# Altium PCB KNoT_Thing_DevBoard.PcbDoc
Units mm, origin at the board's own origin, x right, y up, seen from the top; angles counter-clockwise.
Board outline 38.1 x 40.64 mm, 2 copper layers (Top Layer, Bottom Layer); 48 components, 49 nets, 211 pads, 40 vias.
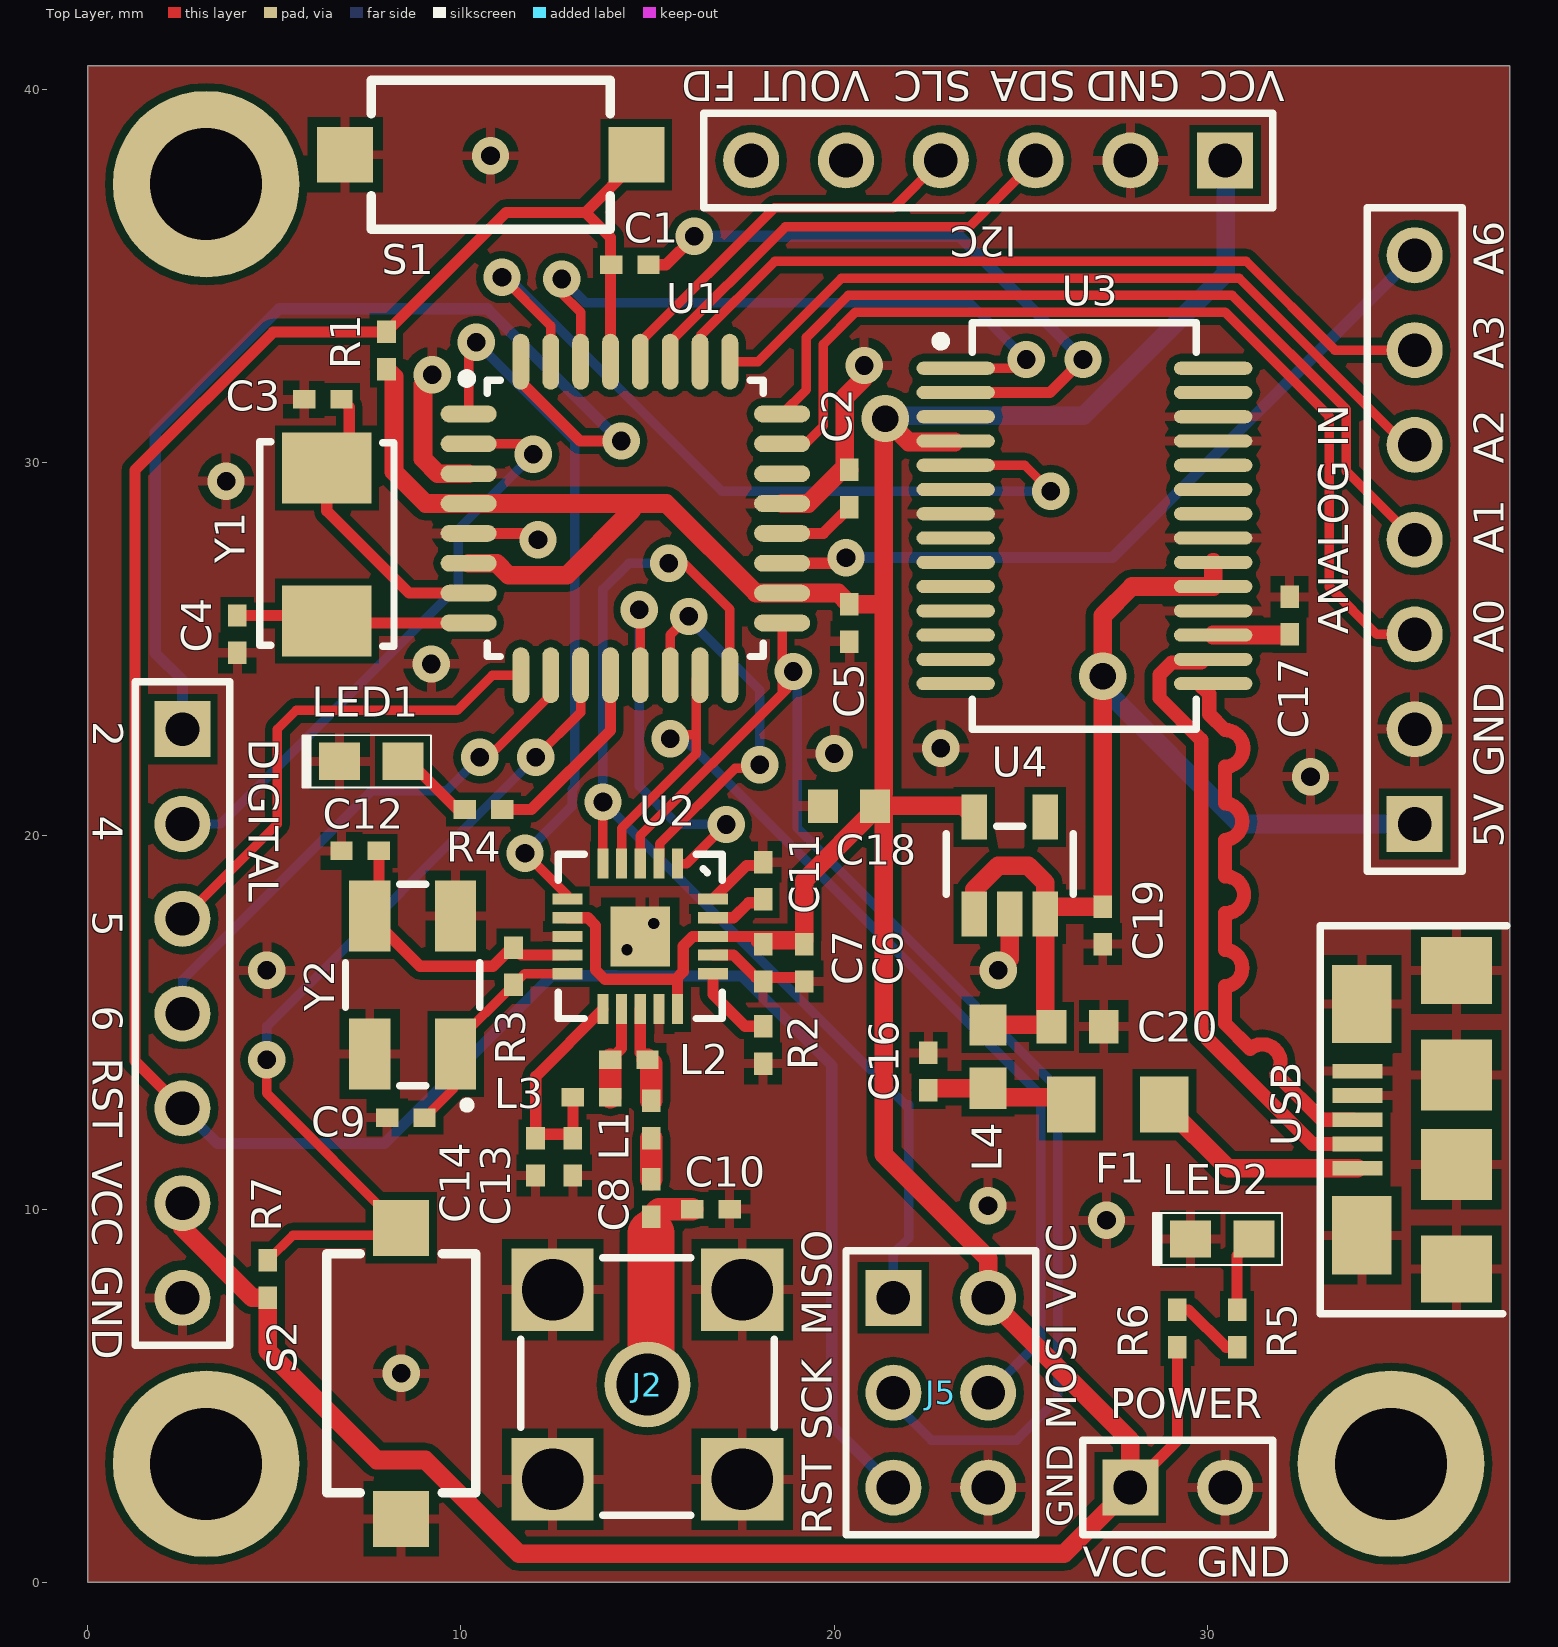
[diagram p0: Top Layer view]
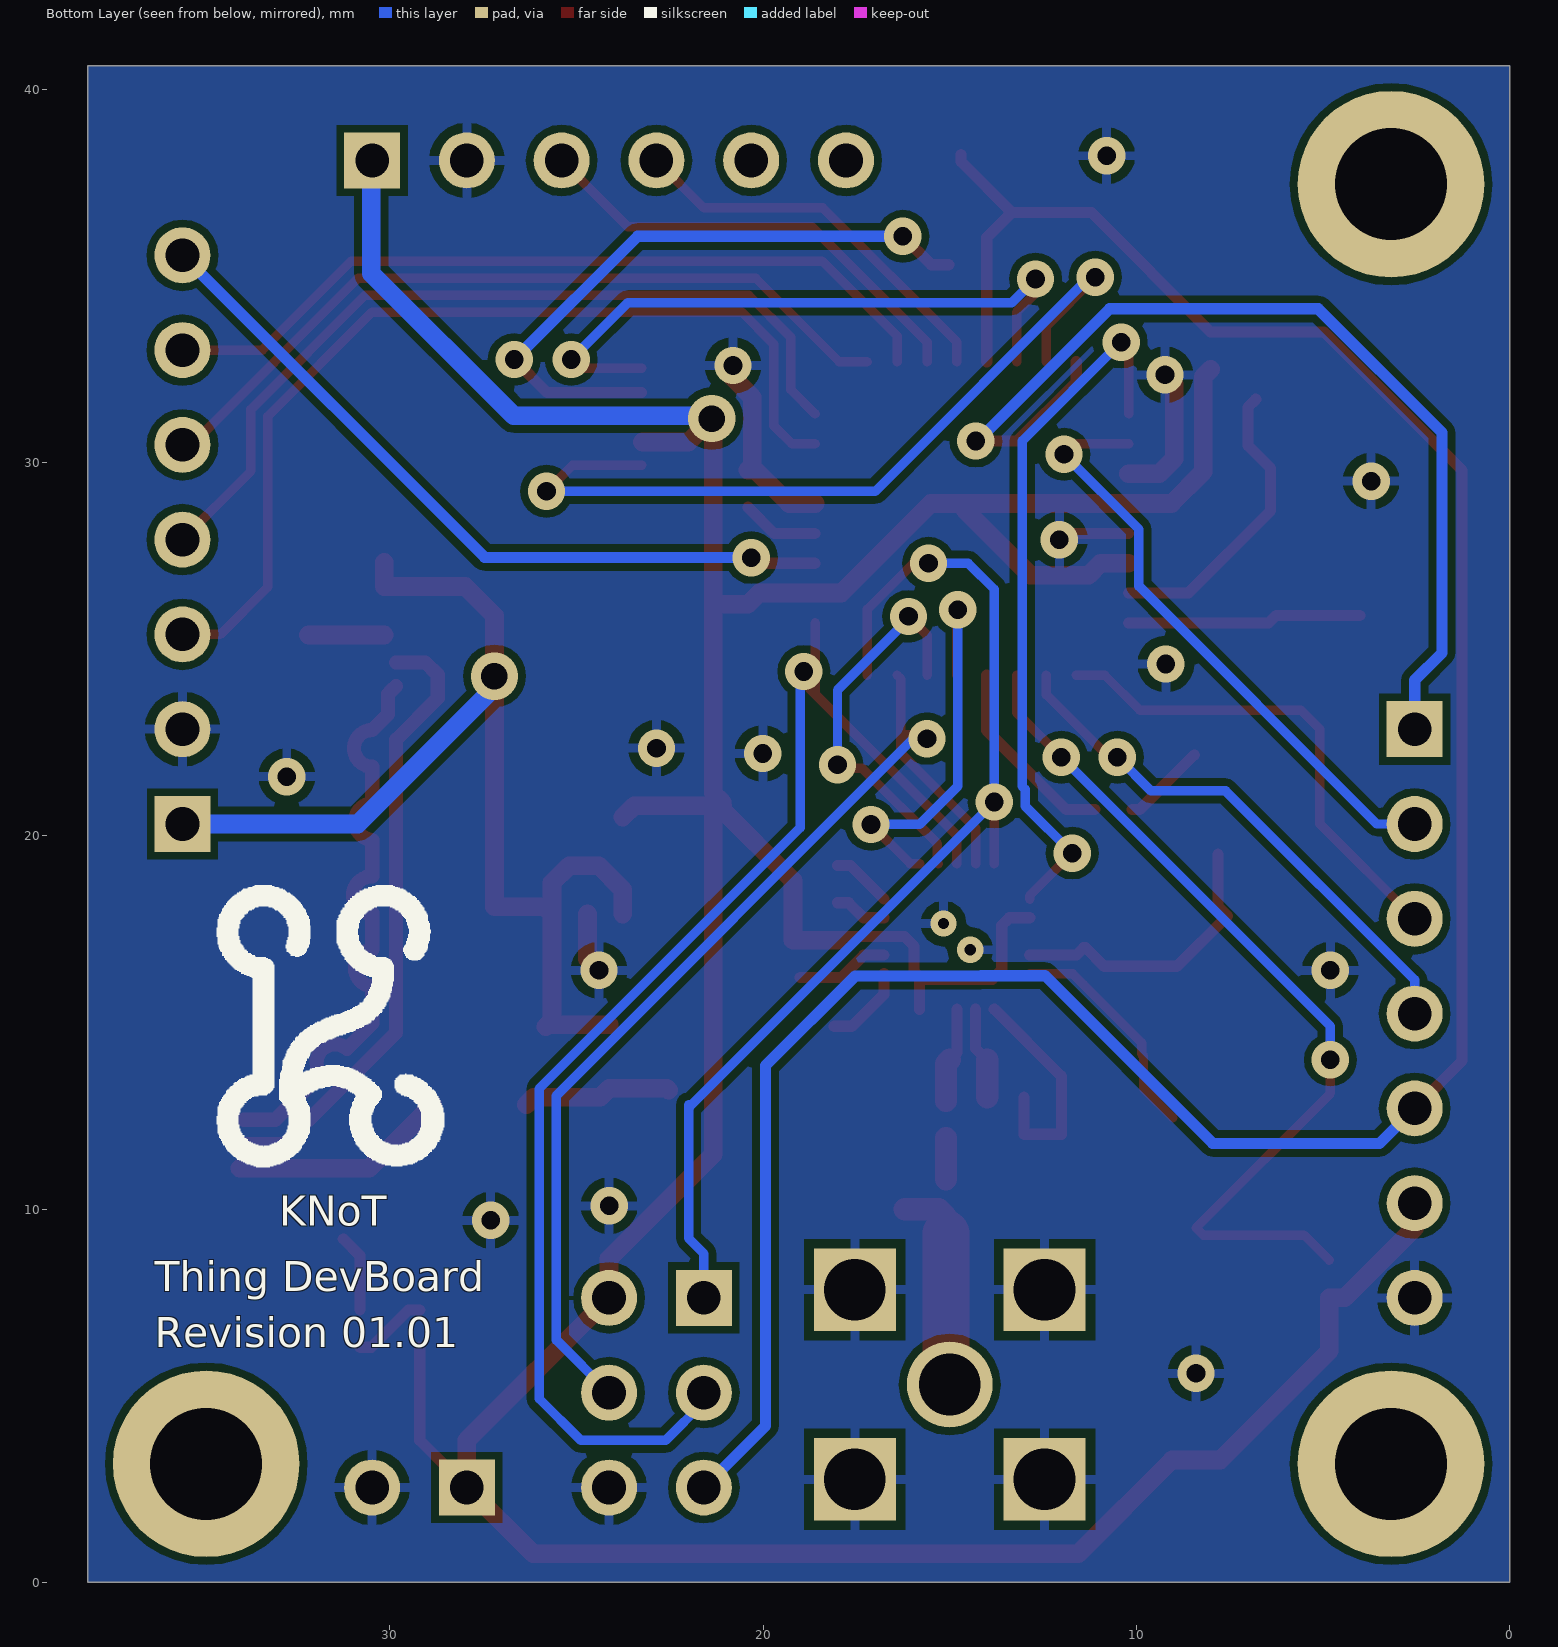
[diagram p1: Bottom Layer view, seen from below]

## Layer stack, top to bottom
Top Solder: solder mask 0.0102, Solder Resist, Dk 3.5
Top Layer: signal copper 0.0356
Dielectric 1: dielectric 0.32, FR-4, Dk 4.8
Bottom Layer: signal copper 0.0356
Bottom Solder: solder mask 0.0102, Solder Resist, Dk 3.5

## Board outline
0,0 0,40.64 38.1,40.64 38.1,0

## Design rules (kind name [scope] priority, off if disabled: settings)
AssemblyTestPointUsage [All] p1 off:
AssemblyTestpoint [All] p1 off: testpointundercomponent=TRUE minsize=1.016 maxsize=2.54 preferedsize=1.524 minholesize=0 maxholesize=1.016 preferedholesize=0.813 testpointgrid=0.025 usegrid=TRUE gridtolerance=0 allowsidetop=TRUE allowsidebottom=TRUE
Clearance [All] p1: gap=0.2
DiffPairsRouting DiffPair_USBDiffPairsRouting [InDifferentialPair ('USB')] p1: maxlimit=0.254 minlimit=0.254 mostfreqgap=0.254 toplayer_minwidth=0.381 toplayer_maxwidth=0.381 toplayer_prefwidth=0.381 bottomlayer_minwidth=0.381 bottomlayer_maxwidth=0.381 bottomlayer_prefwidth=0.381 maxuncoupledlength=12.7
DiffPairsRouting DiffPair_DiffPairsRouting [InDifferentialPair ('USB')] p2: maxlimit=0.254 minlimit=0.254 mostfreqgap=0.254 toplayer_minwidth=0.381 toplayer_maxwidth=0.381 toplayer_prefwidth=0.381 bottomlayer_minwidth=0.381 bottomlayer_maxwidth=0.381 bottomlayer_prefwidth=0.381 maxuncoupledlength=12.7
DiffPairsRouting DiffPairsRouting_1 [All] p3: maxlimit=0.254 minlimit=0.254 mostfreqgap=0.254 toplayer_minwidth=0.381 toplayer_maxwidth=0.381 toplayer_prefwidth=0.381 bottomlayer_minwidth=0.381 bottomlayer_maxwidth=0.381 bottomlayer_prefwidth=0.381 maxuncoupledlength=12.7
DiffPairsRouting [All] p4: maxlimit=0.254 minlimit=0.254 mostfreqgap=0.254 toplayer_minwidth=0.381 toplayer_maxwidth=0.381 toplayer_prefwidth=0.381 bottomlayer_minwidth=0.381 bottomlayer_maxwidth=0.381 bottomlayer_prefwidth=0.381 maxuncoupledlength=12.7
FabricationTestPointUsage [All] p1 off: valid=0 allowmultiple=FALSE
FabricationTestpoint [All] p1 off: side=3 testpointundercomponent=TRUE minsize=1.016 maxsize=2.54 preferedsize=1.524 minholesize=0 maxholesize=1.016 preferedholesize=0.813 testpointgrid=0.025 allowsidetop=TRUE allowsidebottom=TRUE usegrid=TRUE gridtolerance=0
HoleSize [All] p1: absolutevalues=TRUE maxlimit=10 minlimit=0.3 maxpercent=80.000 minpercent=20.000
MatchedLengths DiffPair_USBMatchedLengths [InDifferentialPair ('USB')] p1: tolerance=0.2 checknetsindiffpair=TRUE checkdiffpairvsdiffpair=TRUE checkothers=TRUE
MatchedLengths DiffPair_MatchedLengths [InDifferentialPair ('USB')] p2: tolerance=25.4 checknetsindiffpair=TRUE checkdiffpairvsdiffpair=TRUE checkothers=TRUE
MatchedLengths [All] p3 off: tolerance=25.4 checknetsindiffpair=TRUE checkdiffpairvsdiffpair=TRUE checkothers=TRUE
MinimumAnnularRing [All] p1: minimumring=0.2
MinimumSolderMaskSliver [All] p1: minsoldermaskwidth=0.064
NetAntennae [All] p1 off: netantennaetolerance=0
PolygonConnect [All] p1: connectstyle=Relief reliefconductorwidth=0.254 reliefentries=4 polygonreliefangle="90 Angle" airgapwidth=0.254
RoutingVias [All] p1: holewidth=0.5 width=1 viastyle="Through Hole" minholewidth=0.3 minwidth=0.5 maxholewidth=3 maxwidth=5
SilkToBoardRegionClearance [All] p1 off:
SilkToSilkClearance [All] p1: silktosilkclearance=0.064
SilkToSolderMaskClearance [All] p1: minsilkscreentomaskgap=0.064 clearancetoexposedcopper=TRUE
SolderMaskExpansion [All] p1: expansion=0.102
Width [All] p1: maxlimit=2 minlimit=0.2 preferedwidth=0.2 minimp=50.000000 maximp=50.000000 favimp=50.000000
18 further rules are at their usual default settings.

## Classes and differential pairs
component class Knot_Thing_USB_Power: C16 C17 C18 C19 C20 F1 J4 L4 LED2 R5 R6 U3 U4 USB
component class Knot_Thing_nRF: 1 C6 C7 C8 C9 C10 C11 C12 C13 C14 J2 J5 L1 L2 L3 R2 R3 U2 Y2
component class Knot_Thing_MCU: "ANALOG IN" C1 C2 C3 C4 C5 DIGITAL I2C LED1 POWER R1 R4 R7 S1 S2 U1 Y1

## Components (designator, comment, footprint, x,y, rotation, side; value= is the part's Value field where it differs from the comment)
"ANALOG IN" "Header 7" HDR1X7 35.56,20.32 r90 top
C1 "Cap_0402" CAPC1005L 14.529,35.306 r180 top
C2 "Cap_0402" CAPC1005L 20.408,29.308 r270 top
C3 "Cap_0402" CAPC1005L 6.3,31.7 r0 top
C4 "Cap_0402" CAPC1005L 4.008,25.408 r90 top
C5 "Cap_0402" CAPC1005L 20.408,25.708 r90 top
C6 "Cap_0402" CAPC1005L 19.2,16.6 r90 top
C7 "Cap_0402" CAPC1005L 18.1,16.6 r90 top
C8 "Cap_0402" CAPC1005L 15.1,10.3 r90 top
C9 "Cap_0402" CAPC1005L 8.525,12.45 r0 top
C10 "Cap_0402" CAPC1005L 16.7,10 r180 top
C11 "Cap_0402" CAPC1005L 18.1,18.8 r270 top
C12 "Cap_0402" CAPC1005L 7.3,19.6 r180 top
C13 "Cap_0402" CAPC1005L 13,11.4 r90 top
C14 "Cap_0402" CAPC1005L 12,11.4 r90 top
C16 "Cap_0402" CAPC1005L 22.527,13.689 r270 top
C17 "Cap_0402" CAPC1005L 32.208,25.908 r90 top
C18 "Cap0603" CAPC1608L 20.4,20.8 r180 top
C19 "Cap_0402" CAPC1005L 27.2,17.6 r270 top
C20 "Cap0603" CAPC1608L 26.527,14.889 r0 top
DIGITAL "Header 7" HDR1X7 2.54,22.86 r270 top
F1 "0402L050SLKR" 0805L 27.6,12.8 r180 top
I2C "Header 6" HDR1X6 30.48,38.1 r180 top
J2 "32K249-400L5" ROS-32K249-400L5_V 15,5.3 r180 top
J5 "Header 3X2" HDR2X3 21.59,7.62 r270 top
L1 "Inductor0402" CAPC1005L 15.1,12.4 r90 top
L2 "Inductor0402" CAPC1005L 14.5,14 r180 top
L3 "Inductor0402" CAPC1005L 13.5,13 r180 top
L4 "Ferrite" 0603-cap 24.127,14.089 r90 top
LED1 "LED 0603" 0603_LED 7.6,22 r180 top
LED2 "LED 0603" 0603_LED 30.4,9.2 r180 top
POWER "Header 2H" HDR1X2 27.94,2.54 r0 top
R1 "RES_0402" CAPC1005L 8.008,33.008 r270 top
R2 "RES_0402" CAPC1005L 18.1,14.4 r90 top
R3 "RES_0402" CAPC1005L 11.408,16.508 r90 top
R4 "RES_0402" CAPC1005L 10.608,20.708 r0 top
R5 "RES_0402" CAPC1005L 30.8,6.8 r270 top
R6 "RES_0402" CAPC1005L 29.2,6.8 r270 top
R7 "RES_0402" CAPC1005L 4.826,8.128 r270 top
S1 "SW-SPST" "SWITCH TS-1181" 10.8,38.254 r0 top
S2 "SW-SPST" "SWITCH TS-1181" 8.4,5.6 r90 top
U1 "ATmega328-AU" 32A_L 14.408,28.508 r0 top
U2 "nRF24L01+ QFN20" QFN20 14.808,17.308 r270 top
U3 "FT232RL-Reel" SSOP-28_N 26.708,28.308 r0 top (schematic designator U4)
U4 "MIC5205-3.3YM5" SOT23-5 24.708,19.208 r0 top (schematic designator U5)
USB "ZX62-B-5PA-33" "Micro USB b" 36.474,12.395 r90 top
Y1 "8 MHz" CX5032GB 6.408,27.808 r90 top
Y2 "16 MHz" SPK-16M-5032 8.708,16.008 r90 top

## Footprints (in the part's own frame and the unit in brackets; to place one, negate y for a bottom-side part, rotate by r counter-clockwise, add the part's x,y. Pads: shape width x height; smd on the part's side, far side on the other; paste and mask are expansions set on the pad)
32A_L [mm] "Thin QFP, 32-Leads, Body 7x7mm, Pitch 0.8mm, IPC High Density"
  oval 1.5x0.45 smd: 1(-4.2,2.8) 2(-4.2,2) 3(-4.2,1.2) 4(-4.2,0.4) 5(-4.2,-0.4) 6(-4.2,-1.2) 7(-4.2,-2) 8(-4.2,-2.8) 17(4.2,-2.8) 18(4.2,-2) 19(4.2,-1.2) 20(4.2,-0.4) 21(4.2,0.4) 22(4.2,1.2) 23(4.2,2) 24(4.2,2.8)
  oval 0.45x1.5 smd: 9(-2.8,-4.2) 10(-2,-4.2) 11(-1.2,-4.2) 12(-0.4,-4.2) 13(0.4,-4.2) 14(1.2,-4.2) 15(2,-4.2) 16(2.8,-4.2) 25(2.8,4.2) 26(2,4.2) 27(1.2,4.2) 28(0.4,4.2) 29(-0.4,4.2) 30(-1.2,4.2) 31(-2,4.2) 32(-2.8,4.2)
  silkscreen extent -4.37,-3.7 3.7,3.87, body extent -4.51,-4.51 4.51,4.51, height 1.1
0603-cap [mm] "0603 Hermes"
  rect 1.1x1 smd: 1(-0.85,0) 2(0.85,0)
  body extent -0.8,-0.4 0.8,0.4, height 0.3
0603_LED [mm] "LED tamanho 0603"
  rect 1.1x1 smd: 1(-0.85,0) 2(0.85,0)
  silkscreen extent -1.6,-0.7 1.85,0.7, body extent -0.83,-0.38 0.83,0.35, height 0.68
0805L [mm] "0805 Hermes"
  rect 1.3x1.5 smd: 1(-1.25,0) 2(1.25,0)
  body extent -1.1,-0.75 1.1,0.75, height 1.24
CAPC1005L [mm]
  rect 0.6x0.5 smd: 1(-0.5,0) 2(0.5,0)
  body extent -0.55,-0.3 0.55,0.3, height 0.6
CAPC1608L [mm]
  rect 0.8x0.9 smd: 1(-0.7,0) 2(0.7,0)
  body extent -0.87,-0.48 0.87,0.48, height 0.85
CX5032GB [mm] "Quartz Crystal 8MHz"
  rect 1.9x2.4 smd: 1(-2.05,0) 1(-2.05,0) 2(2.05,0)
  silkscreen extent -2.72,-1.8 2.75,1.8, body extent -2.5,-1.6 2.5,1.6, height 1.3
HDR1X2 [mm] "Connector; Header; 2 Position"
  rect 1.5x1.5 hole 0.9: 1(0,0)
  round 1.5 hole 0.9: 2(2.54,0)
  silkscreen extent -1.27,-1.27 3.81,1.27
HDR1X6 [mm] "Connector; Header; 6 Position"
  rect 1.5x1.5 hole 0.9: 1(0,0)
  round 1.5 hole 0.9: 2(2.54,0) 3(5.08,0) 4(7.62,0) 5(10.16,0) 6(12.7,0)
  silkscreen extent -1.27,-1.27 13.97,1.27
HDR1X7 [mm] "Connector; Header; 7 Position"
  rect 1.5x1.5 hole 0.9: 1(0,0)
  round 1.5 hole 0.9: 2(2.54,0) 3(5.08,0) 4(7.62,0) 5(10.16,0) 6(12.7,0) 7(15.24,0)
  silkscreen extent -1.27,-1.27 16.51,1.27
HDR2X3 [mm] "Connector; Header; 3x2 Position"
  rect 1.5x1.5 hole 0.9: 1(0,0)
  round 1.5 hole 0.9: 2(0,2.54) 3(2.54,0) 4(2.54,2.54) 5(5.08,0) 6(5.08,2.54)
  silkscreen extent -1.27,-1.27 6.35,3.81
"Micro USB b" [mm]
  rect 0.4x1.35 smd: 1(-1.3,2.449) 2(-0.65,2.449) 3(0,2.449) 4(0.65,2.449) 5(1.3,2.449)
  rect 2.1x1.6 smd: 6(3.1,2.33) 11(-3.1,2.33)
  rect 1.8x1.9 smd: 7(4,-0.201) 10(-4,-0.201)
  rect 1.9x1.9 smd: 8(1.2,-0.2) 9(-1.2,-0.201)
  silkscreen extent -5.2,-1.55 5.2,3.45, body extent -4.04,-2.7 4.04,2.9, height 2.78
QFN20 [mm]
  rect 0.8x0.3 smd: 1(-1.95,1) 2(-1.95,0.5) 3(-1.95,0) 4(-1.95,-0.5) 5(-1.95,-1) 11(1.95,-1) 12(1.95,-0.5) 13(1.95,0) 14(1.95,0.5) 15(1.95,1)
  rect 0.3x0.8 smd: 6(-1,-1.95) 6(-1,-1.95) 7(-0.5,-1.95) 8(0,-1.95) 9(0.5,-1.95) 10(1,-1.95) 16(1,1.95) 17(0.5,1.95) 18(0,1.95) 19(-0.5,1.95) 20(-1,1.95)
  rect 1.6x1.6 smd: 21(0,0)
  silkscreen extent -2.2,-2.2 2.2,2.2, body extent -2.01,-2.01 2.01,2.01, height 0.78
ROS-32K249-400L5_V [mm] "SMA Right Angle Jack, 14.8x6.35x9.7mm, Rosenberger Recommended"
  round 2.3 hole 1.65: 1(0,0)
  rect 2.2x2.2 hole 1.65: MH(-2.54,2.54) MH(-2.54,-2.54) MH(2.54,2.54) MH(2.54,-2.54)
  silkscreen extent -3.4,-3.4 3.4,3.5, body extent -4.68,-3.18 4.65,38.97, height 88.23
SOT23-5 [mm]
  rect 0.69x1.2 smd: 1(-0.95,-1.3) 2(0,-1.3) 3(0.95,-1.3) 4(0.95,1.3) 5(-0.95,1.3)
  silkscreen extent -1.7,-0.77 1.7,1.05, body extent -1.5,-1.25 1.5,1.25, height 1.05
SPK-16M-5032 [mm] "Crystal Oscilator"
  rect 1.9x1.1 smd: 1(-1.85,-1.15) 2(1.85,-1.15) 3(1.85,1.15) 4(-1.85,1.15)
  silkscreen extent -3.3,-1.8 2.7,1.8, body extent -2.5,-1.6 2.5,1.6, height 0.9
SSOP-28_N [mm] "SOP, 28-Leads, Body 10.2x5.3mm, Pitch 0.65mm, IPC Medium Density"
  oval 2.1x0.35 smd: 1(-3.45,4.225) 2(-3.45,3.575) 3(-3.45,2.925) 4(-3.45,2.275) 5(-3.45,1.625) 6(-3.45,0.975) 7(-3.45,0.325) 8(-3.45,-0.325) 9(-3.45,-0.975) 10(-3.45,-1.625) 11(-3.45,-2.275) 12(-3.45,-2.925) 13(-3.45,-3.575) 14(-3.45,-4.225) 15(3.45,-4.225) 16(3.45,-3.575) 17(3.45,-2.925) 18(3.45,-2.275) 19(3.45,-1.625) 20(3.45,-0.975) 21(3.45,-0.325) 22(3.45,0.325) 23(3.45,0.975) 24(3.45,1.625) 25(3.45,2.275) 26(3.45,2.925) 27(3.45,3.575) 28(3.45,4.225)
  silkscreen extent -3.97,-5.45 3,5.45, body extent -3.9,-5.1 3.9,5.1, height 1.9
"SWITCH TS-1181" [mm]
  rect 1.5x1.5 smd: 1(-3.9,0) 2(3.9,0)
  silkscreen extent -3.2,-2 3.2,2, body extent -4,-1.8 4,1.8, height 2.4

## Part data
"ANALOG IN" DIGITAL: "Header, 7-Pin"
C1 C2 C3 C4 C5 C6 C7 C8 C9 C10 C11 C12 C13 C14 C16 C17 C19: library part Capacitor_0402, "Chip Capacitor 0402 (1005 metric)"
C18 C20: "4.7µF 10V Ceramic Capacitor X5R 0603"
F1: library part "Fuse 2", "PTC Resettable Fuse 6V 500mA Ih Surface Mount 0402 (1005 Metric), Concave"
I2C: "Header, 6-Pin"
J2: "SMA Right Angle Jack, Up to 18 GHz, -65 to 165 degC"
J5: "Header, 3-Pin, Dual row"
L1 L2 L3: "Inductor 27nH"
L4: "BLM18AG121SN1 FERRITE 120 OHM 500MA 0603"
LED1 LED2: "LED SMD 0603"
POWER: "Header, 2-Pin, Right Angle"
R1 R2 R3 R4 R5 R6 R7: "Precision Thick Film Chip Resistor, 10 Ohm to 1M Ohm Range, 1% and 0.5% Tolerance, 0805 Size, 1/8 W"
S1 S2: "Single-Pole, Single-Throw Switch"
U1: "8-bit AVR Microcontroller, 32KB Flash, 1KB EEPROM, 2KB SRAM, 32-pin TQFP, Industrial Grade (-40°C to 85°C)"
U2: library part nRF24L01+, "IC RF TxRx Only General ISM > 1GHZ 2.4GHz"
U3: "USB UART Asynchronous Serial Data Transfer Chip, 28-pin SSOP, Tape and Reel"
U4: "Voltage Regulator"
USB: "USB Connector"
Y1: library part XTAL, "Crystal FOXSLF/080-20"
Y2: library part XTAL_SMD, "Crystal FOXSLF/080-20"

## Free pads (board coordinates)
  round 5 hole 3: ""(3.175,3.175) ""(3.175,37.465) ""(34.925,3.175)

## Via types
v1: diameter 1, hole 0.5, Top Layer to Bottom Layer, 36 vias
v2: diameter 1.27, hole 0.711, Top Layer to Bottom Layer, 2 vias
v3: diameter 0.7, hole 0.3, Top Layer to Bottom Layer, 2 vias

## Nets (pads, with @x,y where several pads share a name; then routed paths per layer and width w, separated by ;. In a path a pad name is that pad's centre, name@x,y a point inside that pad or via, vN(x,y) a via of type N, cw(c..) or ccw(c..) an arc to the next point about the centre after c; other vN are vias at no path point)
FTDI_DTR: C1.1 U3.2 | length 17.1
  Top Layer w0.3: C1.1 15.494,35.306 v1(16.256,36.068) ; U3.2 25.787,31.883 v1(26.67,32.766)
  Bottom Layer w0.3: v1(16.256,36.068) 23.368,36.068 v1(26.67,32.766)
GND: "ANALOG IN.2" C2.1 C3.1 C4.1 C5.1 C6.1 C7.1 C9.1 C10.1 C11.1 C12.2 C13.1 C14.1 C16.1 C17.2 C18.2 C19.2 C20.2 DIGITAL.7 I2C.2 J2.MH J5.6 LED1.2 LED2.2 POWER.2 R2.1 S1.1 S2.1 U1.3 U1.5 U1.21 U2.8 U2.14 U2.17 U2.20 U2.21 U3.7 U3.18 U3.21 U3.25 U3.26 U4.2 USB.4 USB.5 USB.6 USB.7 USB.8 USB.9 USB.10 USB.11 Y2.2 Y2.4 | length 16.7
  Top Layer w0.3: v1@8.983,32.108 v1(9.233,32.358) ; U1.5 11.897,28.108 v1(12.065,27.94) ; U2.17 17.303,16.808 17.903,16.208 C6.1@19.008,16.208 ; U2.20 17.658,19.208 C11.1@18.008,19.208 ; v1(24.4,16.4) v1@24.708,16.708
  Top Layer w0.5: v1@8.983,32.108 8.983,30.108 9.383,29.708 U1.3 ; U1.21 19.308,28.908 20.208,29.808 C2.1 20.288,29.928 20.288,31.754 20.808,32.274 v1(20.808,32.608) ; v1@24.708,16.708 U4.2
  other v1: 8.4,5.6 27.3,9.7 24.127,10.089 4.8,16.4 32.766,21.59 20.008,22.208 22.86,22.352 9.208,24.608 3.708,29.508 10.795,38.227
  other v3: 14.45,16.95 15.17,17.65
MCU_ADC0: "ANALOG IN.3" U1.23 | length 25.9
  Top Layer w0.254: U1.23 19.231,30.508 19.711,30.988 19.711,33.173 20.574,34.036 30.48,34.036 33.274,31.242 33.274,26.67 34.544,25.4 35.56,25.4
MCU_ADC1: "ANALOG IN.4" U1.24 | length 22.8
  Top Layer w0.254: U1.24 19.257,31.957 19.257,33.361 20.386,34.49 30.668,34.49 33.728,31.43 33.728,29.772 35.56,27.94
MCU_ADC2: "ANALOG IN.5" U1.25 | length 21.1
  Top Layer w0.254: U1.25 17.962,32.708 20.198,34.944 30.856,34.944 35.32,30.48 35.56,30.48
MCU_ADC3: "ANALOG IN.6" U1.26 | length 21.7
  Top Layer w0.254: U1.26 16.408,33.392 18.414,35.398 31.044,35.398 33.422,33.02 35.56,33.02
MCU_ADC6: "ANALOG IN.7" U1.19 | length 20.4
  Top Layer w0.3: U1.19 20.17,27.308 v1(20.32,27.458)
  Bottom Layer w0.3: v1(20.32,27.458) 27.458,27.458 35.56,35.56
MCU_ADC7: U1.22
MCU_AIN0: DIGITAL.4 U1.10 | length 14.5
  Top Layer w0.254: v1(10.508,22.108) 10.734,22.108 12.408,23.782 U1.10
  Bottom Layer w0.254: DIGITAL.4 2.54,16.14 7.608,21.208 9.608,21.208 v1(10.508,22.108)
MCU_AIN1: R7.1 S2.2 U1.11 | length 23.7
  Top Layer w0.254: v1(4.8,14) 4.8,13.1 S2.2 8.2,9.3 5.498,9.3 R7.1 ; v1(12.008,22.108) 13.208,23.308 U1.11
  Bottom Layer w0.254: v1(4.8,14) 4.8,14.9 v1(12.008,22.108)
MCU_AREF: C2.2 U1.20 | length 2.1
  Top Layer w0.3: U1.20 19.708,28.108 C2.2
MCU_I2C_SDA: I2C.3 U1.27 | length 12.3
  Top Layer w0.254: U1.27 15.608,33.234 18.696,36.322 23.622,36.322 I2C.3
MCU_I2C_SLC: I2C.4 U1.28 | length 10.6
  Top Layer w0.254: U1.28 14.808,33.234 18.404,36.83 21.59,36.83 I2C.4
MCU_INT0: DIGITAL.1 U1.32 | length 27.5
  Top Layer w0.3: U1.32 11.608,32.17 13.196,30.582 v1(14.3,30.582)
  Bottom Layer w0.3: DIGITAL.1 2.54,24.176 1.808,24.908 1.808,30.808 5.125,34.125 10.718,34.125 14.262,30.582 v1(14.3,30.582)
MCU_LED: R4.2 U1.12 | length 5.3
  Top Layer w0.3: R4.2 11.886,20.708 14.008,22.83 U1.12
MCU_NRF_CE: U1.13 U2.1 | length 11
  Top Layer w0.254: v1(14.783,26.06) 14.808,26.035 U1.13 ; U2.1 16.058,19.258 v1(17.108,20.308)
  Bottom Layer w0.254: v1(14.783,26.06) 14.781,26.058 14.781,21.335 15.808,20.308 v1(17.108,20.308)
MCU_NRF_IRQ: U1.1 U2.6 | length 19.1
  Top Layer w0.254: U1.1 10.208,32.908 10.408,33.108 v1(10.408,33.233) ; v1(11.719,19.539) 12.858,18.4 U2.6@12.858,18.308
  Bottom Layer w0.254: v1(10.408,33.233) 13.056,30.585 13.056,21.325 12.981,21.25 12.981,20.801 v1(11.719,19.539)
MCU_RESET: C1.2 DIGITAL.5 J5.5 R1.1 S1.2 U1.29 | length 71.9
  Top Layer w0.3: DIGITAL.5@2.9,12.7 DIGITAL.5 1.27,13.97 1.27,29.805 4.973,33.508 R1.1 11.207,36.707 13.339,36.707 ; U1.29 14.008,36.038 13.339,36.707 ; S1.2 14.7,38.068 13.339,36.707
  Bottom Layer w0.3: DIGITAL.5 3.48,11.76 7.95,11.76 12.446,16.256 14.154,16.256 14.16,16.25 17.532,16.25 19.939,13.843 19.939,4.191 J5.5
MCU_RXD: U1.30 U3.1 | length 17.8
  Top Layer w0.254: v1(12.7,34.925) 12.7,34.544 13.208,34.036 U1.30 ; U3.1 24.913,32.533 v1(25.146,32.766)
  Bottom Layer w0.254: v1(12.7,34.925) 13.335,34.29 23.622,34.29 v1(25.146,32.766)
MCU_SPI_CSN: U1.14 U2.2 | length 10.6
  Top Layer w0.254: U2.2 15.331,19.281 15.331,19.793 17.346,21.808 17.908,21.808 v1(18.008,21.908) ; U1.14 15.608,25.387 v1(16.104,25.883)
  Bottom Layer w0.254: v1(16.104,25.883) 16.104,25.812 18.008,23.908 v1(18.008,21.908)
MCU_SPI_MISO: J5.1 U1.16 U2.5 | length 30.2
  Top Layer w0.254: U2.5 v1(13.808,20.908) ; v1(15.57,27.305) 15.977,27.305 17.208,26.074 U1.16
  Bottom Layer w0.254: v1(15.57,27.305) 14.503,27.305 13.808,26.609 v1(13.808,20.908) 21.958,12.758 ; J5.1 21.59,8.81 22,9.22 22,12.8
MCU_SPI_MOSI: J5.4 U1.15 U2.4 | length 29.1
  Top Layer w0.254: U2.4 14.308,20.208 16.308,22.208 16.308,22.708 ; v1(15.608,22.608) 15.708,22.708 16.308,22.708 ; U1.15 16.308,24.208 16.308,22.708
  Bottom Layer w0.254: v1(15.608,22.608) 15.978,22.608 25.542,13.044 25.542,6.492 J5.4
MCU_SPI_SCK: J5.3 U1.17 U2.3 | length 36.8
  Top Layer w0.254: U2.3@14.831,19.281 U2.3 14.808,20.008 18.608,23.808 ; U1.17 18.608,23.808 ; v1(18.908,24.408) 18.908,24.108 18.608,23.808
  Bottom Layer w0.254: v1(18.908,24.408) 19.008,24.308 19.008,20.22 26,13.228 26,4.918 24.892,3.81 22.606,3.81 21.59,4.826 J5.3
MCU_T0: DIGITAL.2 U1.2 | length 16.2
  Top Layer w0.254: U1.2 11.656,30.508 v1(11.938,30.226)
  Bottom Layer w0.254: DIGITAL.2 3.556,20.32 9.931,26.695 9.931,28.219 v1(11.938,30.226)
MCU_T1: DIGITAL.3 U1.9 | length 13.3
  Top Layer w0.254: DIGITAL.3 5.08,20.32 5.08,22.86 5.588,23.368 9.906,23.368 10.846,24.308 U1.9
MCU_TXD: U1.31 U3.5 | length 22.9
  Top Layer w0.254: v1@11.1,35.128 v1(11.1,34.975) 12.408,33.666 U1.31 ; U3.5 25.109,29.933 v1(25.806,29.235)
  Bottom Layer w0.254: v1(11.1,34.975) 11.253,34.975 16.993,29.235 v1(25.806,29.235)
MCU_XTAL1: C3.2 U1.7 Y1.2 | length 8
  Top Layer w0.3: C3.2 7.008,31.492 7.008,30.458 Y1.2 6.408,28.708 8.608,26.508 U1.7
MCU_XTAL2: C4.2 U1.8 Y1.1 | length 6.3
  Top Layer w0.3: C4.2 6.258,25.908 6.408,25.758 6.458,25.708 U1.8
NetC8_1: C8.1 C10.2 J2.1 | length 5.3
  Top Layer w0.6: C8.1@15.298,9.998 C10.2@16.198,9.998
  Top Layer w0.602: J2.1 J2.1@15.1,5.4 ; C8.1 C8.1@15.298,9.998 ; C10.2@16.198,9.998 C10.2
  Top Layer w1.26: J2.1@15.1,5.4 15.1,9.347
NetC8_2: C8.2 L1.1 | length 1.1
  Top Layer w0.6: C8.2 L1.1
NetLED1_1: LED1.1 R4.1 | length 2.3
  Top Layer w0.3: LED1.1@8.45,22.166 9.908,20.708 R4.1
NetLED2_1: LED2.1 R5.1 | length 2.1
  Top Layer w0.3: R5.1 30.8,8.75 LED2.1
NetR5_2: R5.2 R6.1 | length 2
  Top Layer w0.3: R6.1 29.5,7.3 30.5,6.3 R5.2
NRF_DVDD: C11.2 U2.19 | length 1.4
  Top Layer w0.3: U2.19 17.308,17.808 17.708,18.208 C11.2@18.008,18.208
NRF_IREF: R2.2 U2.16 | length 2.2
  Top Layer w0.3: U2.16 16.758,15.758 17.616,14.9 R2.2
NRF_SMA_CONNECTOR1: L1.2 L2.1 U2.13 | length 2.6
  Top Layer w0.3: U2.13 14.808,14.192 L2.1
  Top Layer w0.6: L1.2 L2.1@15.1,13.9
  Top Layer w0.601: L2.1 L2.1@15.1,13.9
NRF_SMA_CONNECTOR2: L2.2 L3.1 U2.12 | length 2.5
  Top Layer w0.3: L2.2 14.308,14.308 U2.12
  Top Layer w0.6: L3.1 L2.2
NRF_VDD_PA: C13.2 C14.2 L3.2 U2.11 | length 6.1
  Top Layer w0.3: L3.2@13.008,13.008 13.008,12.008 12.008,12.008 12.008,13.558 U2.11
NRF_XTAL1: C9.2 R3.1 U2.10 Y2.1 | length 6.1
  Top Layer w0.254: C9.2 9.808,13.233 9.808,14.108 Y2.1 9.858,14.458 R3.1 11.708,16.308 U2.10
NRF_XTAL2: C12.1 R3.2 U2.9 Y2.3 | length 7.9
  Top Layer w0.3: C12.1@7.808,19.508 7.808,18.108 Y2.3 8.908,16.508 10.863,16.508 11.363,17.008 R3.2 11.608,16.808 U2.9
NT3_FD: I2C.6
NT3_VOUT: I2C.5
USB_DM_FTDI: U3.16 USB.2 | length 16.6
  Top Layer w0.381: U3.16@29.84,24.649 29.049,24.649 28.718,24.317 28.718,23.697 29.84,22.575 29.84,14.727 31.613,12.954 32.824,11.743 USB.2@33.849,11.743
USB_DP_FTDI: U3.15 USB.3 | length 16.6
  Top Layer w0.381: U3.15@29.84,24.014 29.964,23.889 30.053,23.801 30.053,23.26 30.475,22.838 cw(c30.475,22.347) 30.475,21.857 30.475,20.876 cw(c30.446,20.385) 30.475,19.895 30.475,18.914 cw(c30.497,18.423) 30.475,17.933 30.475,16.952 cw(c30.446,16.461) 30.475,15.971 30.475,14.975 31.153,14.297 cw(c31.475,13.924) 31.794,14.299 cw(c31.475,13.924) 31.808,14.287 ; 31.75,14.344 31.808,14.287 ; 31.847,13.603 ccw(c31.5,13.95) 31.854,13.611 ; USB.3@33.924,12.393 33.072,12.393 31.854,13.611 ; 31.808,14.287 cw(c31.475,13.924) 31.854,13.611
VBUS: F1.1 USB.1 | length 5.9
  Top Layer w0.5: F1.1 30.555,11.095 USB.1
VCC_3V3: C5.2 C6.2 C7.2 C18.1 DIGITAL.6 I2C.1 J5.2 POWER.1 R1.2 R6.2 R7.2 U1.4 U1.6 U1.18 U2.7 U2.15 U2.18 U3.4 U4.5 | length 122.9
  Top Layer w0.3: U2.7 13.403,17.808 13.608,17.603 13.608,16.413 13.863,16.158 15.753,16.158 ; U2.15 15.808,16.103 15.753,16.158 ; C7.2@18.008,17.208 17.908,17.308 U2.18 16.213,17.308 15.958,17.053 15.958,16.363 15.753,16.158 ; POWER.1 29.2,3.8 R6.2
  Top Layer w0.5: DIGITAL.6@2.88,10.5 DIGITAL.6 2.54,9.5 4.412,7.628 R7.2 4.826,6.198 7.747,3.277 9.042,3.277 11.557,0.762 26.162,0.762 POWER.1 27.94,3.81 J5.2 24.13,8.67 21.336,11.464 21.336,20.564 C18.1 21.1,20.9 21.336,21.136 21.336,26.208 ; R1.2 8.208,32.308 8.208,29.758 9.058,28.908 U1.4 15.508,28.908 17.908,26.508 U1.18 20.108,26.508 C5.2 21.336,26.208 ; U1.6 10.96,27.308 11.278,26.99 12.842,26.99 14.581,28.729 ; C7.2@18.008,17.208 19.2,17.208 19.2,18.806 C18.1@21.147,20.753 ; C18.1@21.082,20.808 23.458,20.808 U4.5 ; U3.4@23.233,30.558 22,30.558 v2(21.373,31.185) 21.336,31.222 21.336,26.208
  Bottom Layer w0.5: v2(21.373,31.185) 21.446,31.258 26.686,31.258 30.5,35.072 30.5,38.08 I2C.1
VCC_5V: "ANALOG IN.1" C19.1 C20.1 L4.2 U3.19 U3.20 U4.1 U4.3 | length 32.1
  Top Layer w0.5: U4.1 23.758,18.558 24.4,19.2 25.2,19.2 25.658,18.742 U4.3 ; L4.2 25.777,14.939 C20.1 ; C20.1@25.658,14.939 U4.3 ; U3.20 U3.19 27.983,26.683 27.2,25.9 C19.1 25.85,18.1 U4.3
  Bottom Layer w0.5: v2(27.2,24.282) 27.2,23.981 30.861,20.32 35.56,20.32
VCC_FTDI_3V3: C17.1 U3.17 | length 2.1
  Top Layer w0.3: C17.1@32.183,25.383 C17.1
  Top Layer w0.5: U3.17 C17.1@32.183,25.383
VCC_FUSE_5V: C16.2 F1.2 L4.1 | length 4
  Top Layer w0.5: C16.2 22.577,13.239 L4.1 24.366,13 26.15,13 F1.2
pads on no net: U3.3 U3.6 U3.8 U3.9 U3.10 U3.11 U3.12 U3.13 U3.14 U3.22 U3.23 U3.24 U3.27 U3.28 U4.4

## Polygon pours and split planes (outlines as drawn)
GND on Top Layer "GND plane" (solid, pour order 6): 0,0 0,40.64 38.1,40.64 38.1,0
GND on Bottom Layer "GND plane" (solid, pour order 4): 0,0 0,40.64 38.1,40.64 38.1,0

## Other copper
Top Layer:
  text ".Layer_Name" at 14.478,45.085 h0.8
Bottom Layer:
  text ".Layer_Name" at 14.478,45.085 h0.8

## Silkscreen, mask and mechanical layers (free items; w line width, h text height)
Top Overlay:
  text ".Layer_Name" at 14.478,45.085 h0.8
  text "SLC" at 23.683,40.496 h0.8 r180
  text "SDA" at 26.483,40.496 h0.8 r180
  text "GND" at 29.283,40.496 h0.8 r180
  text "VCC" at 32.083,40.496 h0.8 r180
  text "FD" at 17.399,40.485 h0.8 r180
  text "VOUT" at 20.955,40.485 h0.8 r180
  text "A6" at 37.945,35.019 h0.8 r90
  text "A3" at 37.945,32.512 h0.8 r90
  text "A2" at 37.945,29.972 h0.8 r90
  text "A1" at 37.945,27.559 h0.8 r90
  text "A0" at 37.945,24.892 h0.8 r90
  text "2" at 0.142,23.076 h0.8 r270
  text "GND" at 37.945,21.59 h0.8 r90
  text "4" at 0.14,20.536 h0.8 r270
  text "5V" at 37.945,19.685 h0.8 r90
  text "5" at 0.14,17.996 h0.8 r270
  text "6" at 0.14,15.456 h0.8 r270
  text "RST" at 0.14,14.051 h0.8 r270
  text "VCC" at 0.126,11.283 h0.8 r270
  text "GND" at 0.126,8.483 h0.8 r270
  text "VCC" at 26.492,7.315 h0.8 r90
  text "MISO" at 19.939,6.604 h0.8 r90
  text "MOSI" at 26.492,4.089 h0.8 r90
  text "SCK" at 19.939,3.81 h0.8 r90
  text "GND" at 26.391,1.473 h0.7 r90
  text "RST" at 19.939,1.27 h0.8 r90
  text "VCC" at 26.67,0.155 h0.8
  text "GND" at 29.718,0.155 h0.8
Bottom Overlay:
  drawing of 853 lines, arcs and shapes, not listed
  text ".Layer_Name" at 14.478,45.085 h0.8
  text "KNoT" at 32.964,9.551 h0.8
  text "Thing DevBoard" at 36.3,7.8 h0.8
  text "Revision 01.01" at 36.3,6.3 h0.8
Top Paste:
  text ".Layer_Name" at 14.478,45.085 h0.8
Bottom Paste:
  text ".Layer_Name" at 14.478,45.085 h0.8
Top Solder:
  text ".Layer_Name" at 14.478,45.085 h0.8
  text ".Layer_Name" at 14.478,45.085 h0.8
Bottom Solder:
  text ".Layer_Name" at 14.478,45.085 h0.8
Drill Guide:
  text ".Layer_Name" at 14.478,45.085 h0.8
Mechanical 1:
  the board outline again, w0.05
  text ".Layer_Name" at 14.478,45.085 h0.8
Mechanical 11:
  text ".Layer_Name" at 14.478,45.085 h0.8
Mechanical 13:
  text ".Layer_Name" at 14.478,45.085 h0.8
Mechanical 15:
  text ".Layer_Name" at 14.478,45.085 h0.8
Drill Drawing:
  text ".Layer_Name" at 14.478,45.085 h0.8

## Dimensions
0,40.64 to 38.1,40.64 on Mechanical 1
0,0 to 0,40.64 on Mechanical 1